# Altium PCB IPMC_MACP - ADC放错位置.PcbDoc
Units mil, origin at the board's own origin, x right, y up, seen from the top; angles counter-clockwise.
Board outline 3909.92 x 3909.91 mil, 2 copper layers (Top Layer, Bottom Layer); 133 components, 84 nets, 498 pads, 171 vias.
Unrouted connection lines stored in the file: 86.
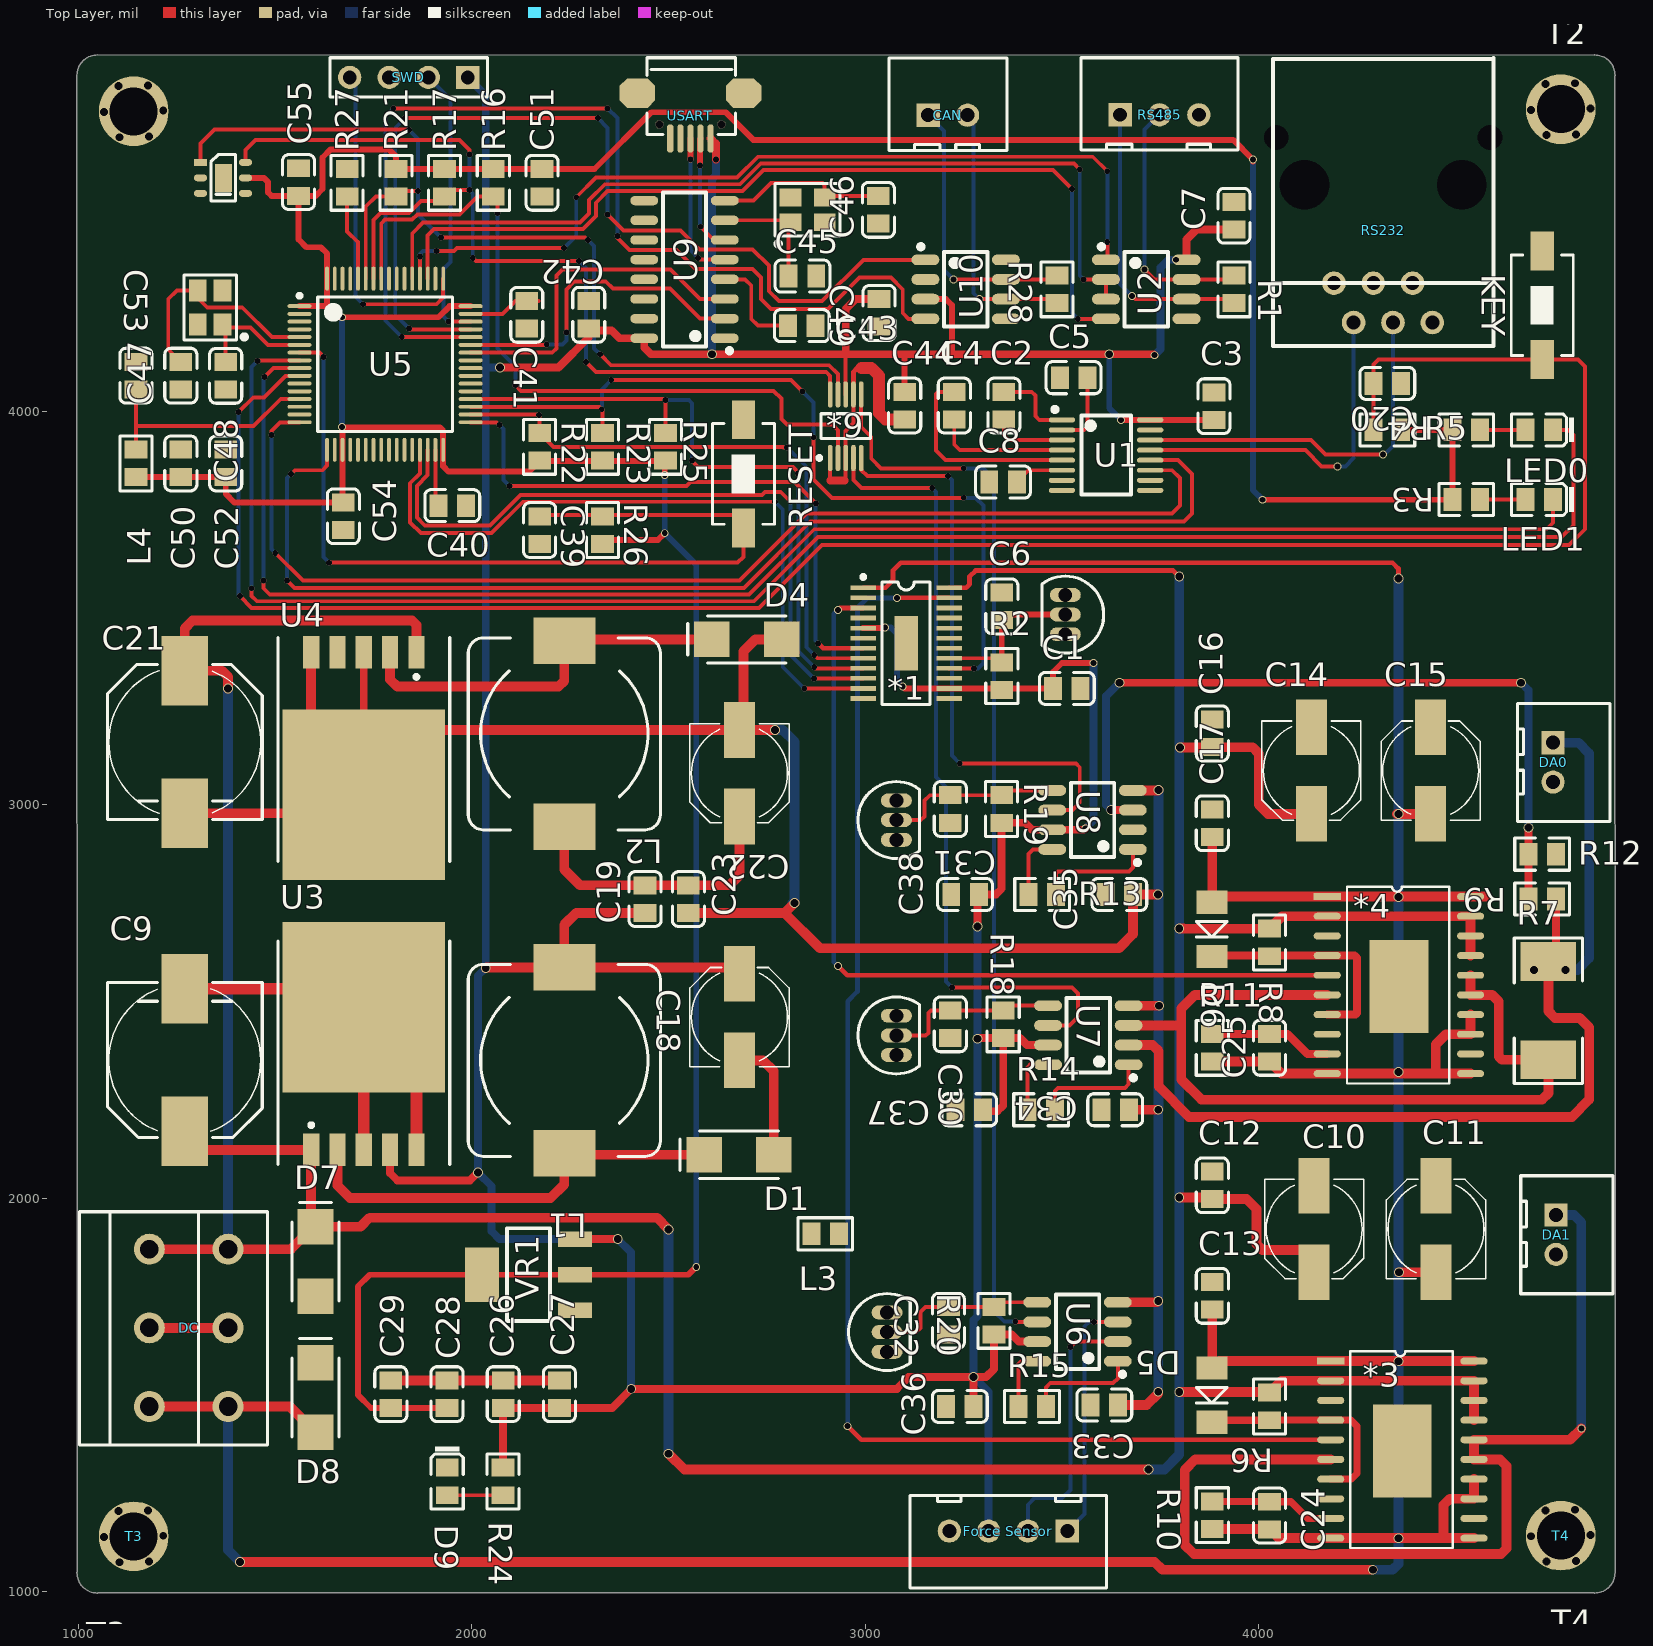
[diagram p0: Top Layer view]
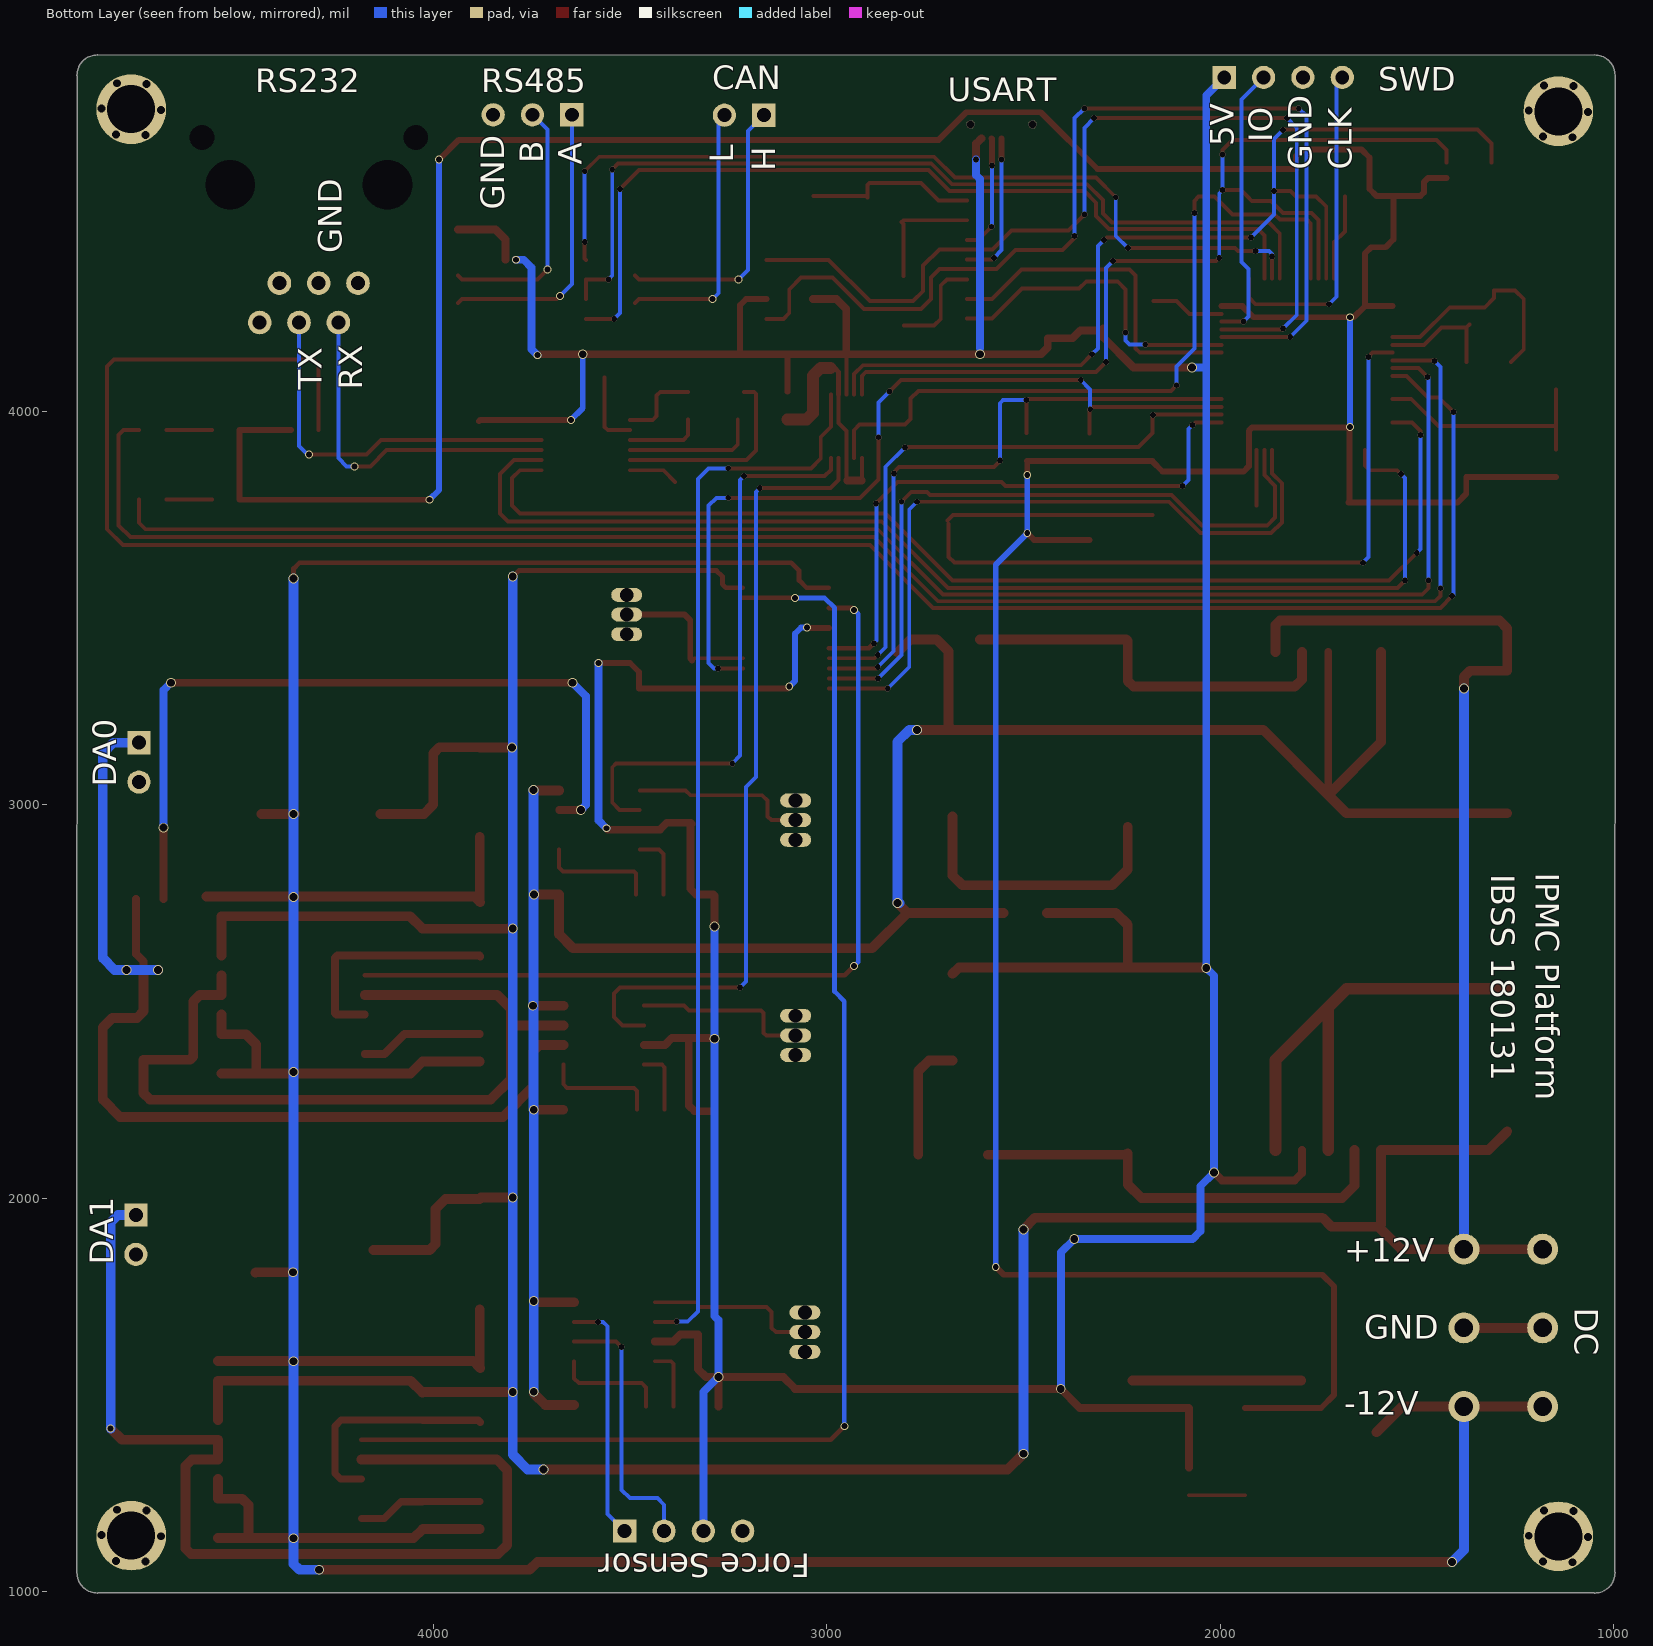
[diagram p1: Bottom Layer view, seen from below]
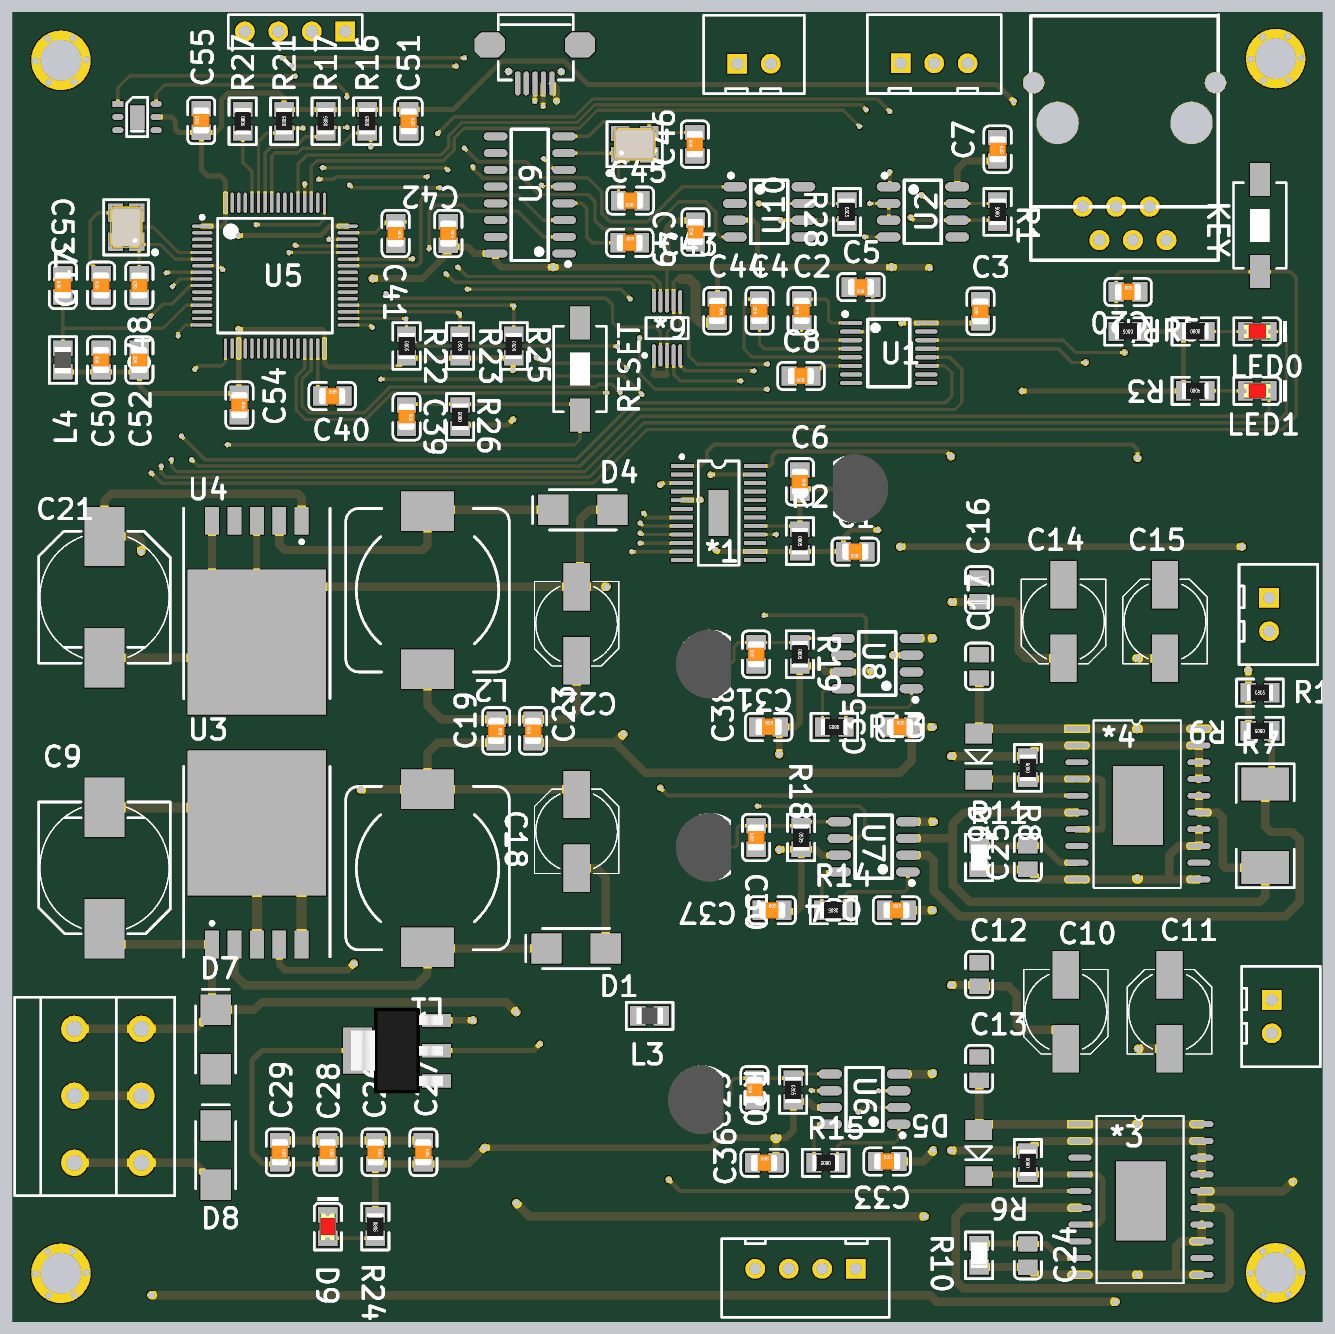
[diagram p2: 3D render of the assembled board from above, using the file's embedded part models]

## Layer stack, top to bottom
Top Solder: solder mask 0.4, Solder Resist, Dk 3.5
Top Layer: signal copper 1.4
Dielectric 1: dielectric 12.6, FR-4, Dk 4.8
Bottom Layer: signal copper 1.4
Bottom Solder: solder mask 0.4, Solder Resist, Dk 3.5

## Board outline
1040.51,996.32 ccw(c1042.13,1000) 1042.13,995.99 1043.65,995.99 ccw(c1047.64,1047.64) 1047.64,995.83 ccw(c1047.64,999.84) 1048.74,995.99 4852.84,995.98 ccw(c4853.94,999.84) 4853.94,995.83 ccw(c4853.94,1047.64) 4905.74,1047.45 ccw(c4901.73,1047.64) 4905.75,1047.64 ccw(c4901.73,1047.64) 4905.75,1047.64 4905.59,4852.84 ccw(c4901.73,4853.94) 4905.74,4853.94 ccw(c4853.94,4853.94) 4853.94,4905.74 ccw(c4853.94,4901.73) 4852.82,4905.59 1047.64,4905.74 ccw(c1047.64,4901.73) 1047.64,4905.74 ccw(c1047.64,4853.94) 995.83,4854.12 ccw(c999.84,4853.94) 995.83,4853.94 995.98,1048.74 ccw(c999.84,1047.64) 995.83,1047.64 ccw(c1047.64,1047.64)

## Design rules (kind name [scope] priority, off if disabled: settings)
Clearance [All] p1: gap=7 ignorepadtopadclearanceinfootprint=FALSE except(0: Arc-Hole Track-Hole SMDPad-Hole THPad-Hole Via-Hole Fill-Hole Poly-Hole Region-Hole Text-Hole)
PolygonConnect [All] p1: connectstyle=Relief reliefconductorwidth=10 reliefentries=4 polygonreliefangle="90 Angle" airgapwidth=10
RoutingVias [All] p1: holewidth=28 width=50 viastyle="Through Hole" minholewidth=15 minwidth=15 maxholewidth=28 maxwidth=50
SolderMaskExpansion [All] p1: expansion=4
Width [All] p1: maxlimit=50 minlimit=8 preferedwidth=10
30 further rules are at their usual default settings.

## Classes and differential pairs
component class IPMC_MACP: *1 *3 *4 *9 C1 C2 C3 C4 C5 C6 C7 C8 C9 C10 C11 C12 C13 C14 C15 C16 C17 C18 C19 C20 C21 C22 C23 C24 C25 C26 C27 C28 C29 C30 C31 C32 C33 C34 C35 C36 C37 C38 C39 C40 C41 C42 C43 C44 C45 C46 C47 C48 C49 C50 C51 C52 C53 C54 C55 CAN D1 D4 D5 D6 D7 D8 D9 "Force Sensor" L2 L3 L4 R1 R2 R3 R4 R5 R6 R7 R8 R9 R10 R11 R12 R13 R14 R15 R16 R17 R18 R19 R20 R21 R22 R23 R24 R25 R26 R27 R28 RESET RS232 RS485 SWD T2 T3 T4 U1 U2 U3 U4 U5 U6 U7 U8 U9 U10 USART VR1

## Components (designator, comment, footprint, x,y, rotation, side; value= is the part's Value field where it differs from the comment)
*1 "AD5722" TSSOP24P 3103.75,3410.43 r270 top
*2 "LM336" TO-92A 3508.19,3483.07 r180 top
*3 "OPA564AIDWP" HSOP20 4182.91,1585.43 r0 top
*4 "OPA564AIDWP" HSOP20 4174.14,2766.32 r0 top
*6 "LM336" TO-92A 3078.74,2413.39 r0 top
*7 "LM336" TO-92A 3078.74,2960.63 r0 top
*8 "LM336" TO-92A 3055.12,1659.13 r0 top
*9 "ADS1115" MSOP-UN10_N 2950,3962.08 r90 top
*10 "SHT20" DFN6 1423,4554.68 r180 top
C1 "100nF" 0805_C 3512.13,3295.28 r180 top
C2 "100nF" 0805_C 3352.07,4014.44 r90 top
C3 "100nF" 0805_C 3886,4013 r90 top
C4 "100nF" 0805_C 3226.04,4014.44 r90 top
C5 "100nF" 0805_C 3529.24,4085.31 r180 top
C6 "100nF" 0805_C 3346.77,3503.94 r270 top
C7 "100nF" 0805_C 3937,4497 r270 top
C8 "100nF" 0805_C 3350,3820 r180 top
C9 "470uF/35V" C-RB-S10 1270,2350.67 r90 top
C10 "47uF/35V" C-RB-S6 4140.81,1921.18 r90 top
C11 "47uF/35V" C-RB-S6 4450.58,1921.18 r270 top
C12 "100nF" 0805_C 3881.89,2032.42 r270 top
C13 "100nF" 0805_C 3881.89,1751.28 r270 top
C14 "47uF/35V" C-RB-S6 4133.86,3086.61 r90 top
C15 "47uF/35V" C-RB-S6 4437.01,3086.61 r270 top
C16 "100nF" 0805_C 3881.89,3181.1 r270 top
C17 "100nF" 0805_C 3881.89,2952.76 r270 top
C18 "220uF/16V" C-RB-S6 2680,2460 r270 top
C19 "100nF" 0805_C 2440,2760 r270 top
C20 "100nF" 0805_C 4326.77,4070.87 r0 top
C21 "470uF/35V" C-RB-S10 1270,3159.33 r270 top
C22 "220uF/16V" C-RB-S6 2680,3080 r90 top
C23 "100nF" 0805_C 2550,2760 r90 top
C24 "1nF" 0805_C 4027.56,1192.91 r90 top
C25 "1nF" 0805_C 4027.56,2381.89 r90 top
C26 "10uF" 0805_C 2079.47,1501.51 r270 top
C27 "100nF" 0805_C 2222.39,1501.51 r270 top
C28 "10uF" 0805_C 1936.56,1501.51 r270 top
C29 "100nF" 0805_C 1793.64,1501.51 r270 top
C30 "100nF" 0805_C 3215.91,2441.64 r90 top
C31 "100nF" 0805_C 3215.91,2988.88 r90 top
C32 "100nF" 0805_C 3211.22,1687.87 r90 top
C33 "100nF" 0805_C 3607.54,1474.09 r0 top
C34 "100nF" 0805_C 3635.1,2224.41 r0 top
C35 "100nF" 0805_C 3645.67,2771.65 r0 top
C36 "100nF" 0805_C 3240.16,1470.16 r0 top
C37 "100nF" 0805_C 3263.78,2224.41 r0 top
C38 "100nF" 0805_C 3253.35,2771.65 r0 top
C39 "100nF" 0805_C 2172.05,3698 r270 top
C40 "2.2uF" 0805_C 1950,3760 r0 top
C41 "2.2uF" 0805_C 2139.29,4245.17 r270 top
C42 "100nF" 0805_C 2296.83,4245.17 r270 top
C43 "100nF" 0805_C 2838.64,4217.61 r0 top
C44 "100nF" 0805_C 3100,4014.44 r270 top
C45 "22pF" 0805_C 2840.09,4343.59 r180 top
C46 "22pF" 0805_C 3033,4512 r90 top
C47 "22pF" 0805_C 1259.84,4090.55 r90 top
C48 "22pF" 0805_C 1374.02,4090 r90 top
C49 "100nF" 0805_C 3035,4250 r90 top
C50 "100nF" 0805_C 1259.84,3867.4 r90 top
C51 "100nF" 0805_C 2178.13,4580.63 r270 top
C52 "100nF" 0805_C 1374.02,3867.4 r90 top
C53 "100nF" 0805_C 1145.67,4090.55 r90 top
C54 "100nF" 0805_C 1673,3733 r270 top
C55 "100nF" 0805_C 1559.06,4582.68 r90 top
CAN "Header 2" HDR2X1_B1 3159.79,4752.64 r0 top (schematic designator CAN1)
D1 "1N5824" DIODE-SMA 2767.16,2110 r180 top
D4 "1N5824" DIODE-SMA 2787.16,3420 r180 top
D5 "1N4732" DIODE-1206 3880.57,1567.83 r270 top
D6 "1N4732" DIODE-1206 3880.57,2751.97 r270 top
D7 "1N4001" DIODE-SMA 1602.2,1749.88 r90 top
D8 "1N4001" DIODE-SMA 1602.2,1404.53 r90 top
D9 "红灯 0805" 0805_LED_S1 1937.01,1279.53 r270 top
DA0 "Header 2" HDR2X1_B1 4748.03,3157.48 r270 top (schematic designator DA1)
DA1 "Header 2" HDR2X1_B1 4755.91,1956.69 r270 top (schematic designator DA2)
DC "KF301-3P" KF301-3P 1180,1470 r90 top (schematic designator *5)
"Force Sensor" "Header 4" HDR4X1_B1 3513.39,1153.54 r180 top (schematic designator "Force Sensor1")
KEY "SW-PB" SW_PB2_A1 4720.47,4271.65 r180 top (schematic designator S1)
L1 "33uH" L-SMD-12 2234.69,2350 r90 top
L2 "33uH" L-SMD-12 2234.69,3180 r270 top
L3 "10uH/磁珠" 0805_L 2897.96,1909 r0 top
L4 "10uH" 0805_L 1145.67,3867.4 r270 top
LED0 "红灯 0805" 0805_LED_S1 4712.6,3952.76 r180 top (schematic designator D3)
LED1 "翠绿 0805" 0805_LED_S1 4712.6,3775.59 r180 top (schematic designator D2)
R1 "120Ω" 0805_R 3937,4310 r90 top
R2 "2.4KΩ" 0805_R 3346.77,3326.77 r270 top
R3 "1KΩ" 0805_R 4527.56,3775.59 r0 top
R4 "1KΩ" 0805_R 4527.56,3952.76 r0 top
R5 "10KΩ" 0805_R 4326.77,3952.76 r180 top
R6 "10KΩ" 0805_R 4027.56,1470.13 r90 top
R7 "10mR" 2512 4736.22,2476.38 r90 top
R8 "10KΩ" 0805_R 4027.56,2649.61 r90 top
R9 "10KΩ" 0805_R 4720.47,2759.84 r180 top
R10 "10KΩ" 0805_R 3881.89,1193.9 r90 top
R11 "10KΩ" 0805_R 3881.89,2381.89 r90 top
R12 "1KΩ" 0805_R 4720.47,2874.02 r0 top
R13 "0Ω" 0805_R 3449.51,2771.65 r180 top
R14 "200Ω" 0805_R 3446.85,2224.41 r180 top
R15 "1KΩ" 0805_R 3423.85,1470.16 r180 top
R16 "4.7KΩ" 0805_R 2054.28,4580.63 r90 top
R17 "4.7KΩ" 0805_R 1930.44,4580.63 r90 top
R18 "2.4KΩ" 0805_R 3350.39,2441.64 r270 top
R19 "2.4KΩ" 0805_R 3346.46,2988.89 r270 top
R20 "2.4KΩ" 0805_R 3326.77,1687.87 r270 top
R21 "4.7KΩ" 0805_R 1806.6,4580.63 r90 top
R22 "4.7KΩ" 0805_R 2172.05,3909.45 r270 top
R23 "4.7KΩ" 0805_R 2332.09,3909.45 r270 top
R24 "1KΩ" 0805_R 2078.74,1279.53 r270 top
R25 "4.7KΩ" 0805_R 2492.13,3909.45 r270 top
R26 "10KΩ" 0805_R 2332.09,3698 r90 top
R27 "10KΩ" 0805_R 1682.76,4580.63 r270 top
R28 "120Ω" 0805_R 3487,4310 r270 top
RESET "SW-PB" SW_PB2_A1 2690,3843 r180 top (schematic designator RESET1)
RS232 "RJ11" RJ6-RJ11 4316.23,4325.57 r270 top (schematic designator RS1)
RS485 "Header 3" HDR3X1_B1 3647.75,4753.64 r0 top (schematic designator RS2)
SWD "Header 4" HDR1X4 1989.25,4848.64 r180 top (schematic designator SWD1)
T1 "M3铜柱螺丝孔" 螺丝孔-3MM 1140,4762.52 r0 top
T2 "M3铜柱螺丝孔" 螺丝孔-3MM 4767.72,4767.72 r0 top
T3 "M3铜柱螺丝孔" 螺丝孔-3MM 1140,1140 r0 top
T4 "M3铜柱螺丝孔" 螺丝孔-3MM 4767.72,1141.73 r0 top
U1 "SP3232EEY-L/TR" TSSOP-16 3611.91,3888.46 r270 top
U2 "SP3485EN-L/TR" SOIC-8_150MIL 3714,4310 r270 top
U3 "LM2596S-5.0" TO-263-5 1725,2288.66 r0 top
U4 "LM2596S-5.0" TO-263-5 1725,3221.34 r180 top
U5 "STM32F405RGT6" STM-LQFP64_L 1779.21,4119.57 r0 top
U6 "AD620ARZ-REEL" SOIC-8_150MIL 3539.37,1660.12 r90 top
U7 "AD620ARZ-REEL" SOIC-8_150MIL 3566.93,2413.88 r90 top
U8 "AD620ARZ-REEL" SOIC-8_150MIL 3577.5,2961.13 r90 top
U9 "CH340G" SOIC-16_150MIL 2540.31,4360.44 r90 top
U10 "CAN/TJA1050T/CM" SOIC-8_150MIL 3255,4310 r270 top
USART "USB_M" USB_MICRO 2655.39,4758.64 r180 top (schematic designator USB_USART1)
VR1 "AMS1117-3.3" ? 2143.78,1805 r0 top
Y1 "12MHZ" SMD-3225_4P 2853.14,4512.07 r0 top
Y2 "25MHZ" SMD-3225_4P 1334.65,4263.78 r90 top

## Footprints (in the part's own frame and the unit in brackets; to place one, negate y for a bottom-side part, rotate by r counter-clockwise, add the part's x,y. Pads: shape width x height; smd on the part's side, far side on the other; paste and mask are expansions set on the pad)
0805_C [mm]
  rect 1.16x1.47 smd: 1(-0.89,0) 2(0.89,0)
  silkscreen extent -1.77,-1.04 1.77,1.04, body extent -1,-0.62 1,0.63, height 0.77
0805_L [mm]
  rect 1.16x1.47 smd: 1(-0.89,0) 2(0.89,0)
  silkscreen extent -1.77,-1.04 1.77,1.03, body extent -1.02,-0.64 1.03,0.64, height 0.6
0805_LED_S1 [mm]
  rect 1.16x1.47 smd: A(0.89,0) K(-0.89,0)
  silkscreen extent -2.25,-1.04 1.77,1.03, body extent -1.01,-0.62 1.01,0.62, height 1.1
0805_R [mm]
  rect 1.16x1.47 smd: 1(-0.89,0) 2(0.89,0)
  silkscreen extent -1.77,-1.04 1.77,1.03, body extent -1,-0.62 1,0.63, height 0.49
2512 [mm]
  rect 2.5x3.6 smd: 1(-3.175,0) 2(3.175,0)
  silkscreen extent -4.7,-2.2 4.7,2.2, body extent -3.17,-1.65 3.17,1.65, height 1.2
C-RB-S6 [mm] "贴片电解"
  rect 3.6x2 smd: 1(-2.794,0) 2(2.794,0)
  silkscreen extent -3.2,-3.2 3.2,3.2, body extent -3.15,-3.12 3.15,3.17, height 7.7
C-RB-S10 [mm] "贴片电解"
  rect 4.5x3 smd: 1(-4.6,0) 2(4.6,0)
  silkscreen extent -5,-5 5,5, body extent -4.97,-4.92 5.03,5.08, height 10
DFN6 [mm]
  rect 0.85x0.45 smd: 1(2.87,-1.981)
  rect 1.1x1.8 smd: 2(1.397,-0.965)
  oval 0.85x0.45 smd: 2(2.87,-0.981) 3(2.87,0.019) 4(-0.03,0.019) 5(-0.03,-0.981) 6(-0.03,-1.981)
  silkscreen extent 0.61,-2.48 2.2,0.52, body extent 0.19,-2.46 2.63,0.55, height 1
DIODE-1206 [mm] "玻璃封装二极管"
  rect 1.5x2 smd: 1(0,0) 2(3.5,0)
  silkscreen extent 1.25,-1 2.25,1
DIODE-SMA [mm] "贴片二极管"
  rect 2.3x2.3 smd: 1(0,0) 2(4.5,0)
  silkscreen extent -0.29,-1.52 6.06,1.52, body extent -0.67,-1.4 5.17,1.4, height 3
HDR1X4 [mm] "Connector; Header; 4 Position"
  rect 1.5x1.5 hole 0.9: 1(0,0)
  round 1.5 hole 0.9: 2(2.54,0) 3(5.08,0) 4(7.62,0)
  silkscreen extent -1.27,-1.27 8.89,1.27
HDR2X1_B1 [mm] "Connector; Header; 4 Position"
  rect 1.5x1.5 hole 0.9: 1(0,0)
  round 1.5 hole 0.9: 2(2.54,0)
  silkscreen extent -2.54,-2.29 5.08,3.68, body extent -2.41,-2.16 5.08,3.56, height 1.5
HDR3X1_B1 [mm] "Connector; Header; 3 Position"
  rect 1.5x1.5 hole 0.9: 1(0,0)
  round 1.5 hole 0.9: 2(2.54,0) 3(5.08,0)
  silkscreen extent -2.54,-2.29 7.62,3.68, body extent -2.54,-2.29 7.62,3.68, height 1.5
HDR4X1_B1 [mm] "Connector; Header; 4 Position"
  rect 1.5x1.5 hole 0.9: 1(0,0)
  round 1.5 hole 0.9: 2(2.54,0) 3(5.08,0) 4(7.62,0)
  silkscreen extent -2.54,-2.29 10.16,3.68, body extent -2.41,-2.16 10.03,3.56, height 1.5
HSOP20 [mm]
  rect 1.75x0.45 smd: 1(0,0)
  oval 1.75x0.45 smd: 2(0,-1.27) 3(0,-2.54) 4(0,-3.81) 5(0,-5.08) 6(0,-6.35) 7(0,-7.62) 8(0,-8.89) 9(0,-10.16) 10(0,-11.43) 11(9.254,-11.43) 12(9.254,-10.16) 13(9.254,-8.89) 14(9.254,-7.62) 15(9.254,-6.35) 16(9.254,-5.08) 17(9.254,-3.81) 18(9.254,-2.54) 19(9.254,-1.27) 20(9.254,0)
  rect 3.8x6 smd: ""(4.623,-5.817)
  silkscreen extent 1.27,-12.06 7.87,0.64, body extent 1.27,-12.06 7.87,0.64, height 0.25
KF301-3P [mm] "蓝色端子"
  round 2 hole 1.2: 1(0,0) 1(0,-5.08) 2(5.08,-5.08) 2(5.08,0) 3(10.16,-5.08) 3(10.16,0)
  silkscreen extent -2.49,-7.62 12.57,4.52
L-SMD-12 [mm] "贴片电感12*12"
  rect 3x4 smd: 1(-6,0) 2(6,0)
  silkscreen extent -6.2,-6.2 6.2,6.2, body extent -6.2,-6.22 6.2,6.17, height 2.5
MSOP-UN10_N [mm] "TSSOP"
  oval 1.7x0.3 smd: 1(-2.05,1) 2(-2.05,0.5) 3(-2.05,0) 4(-2.05,-0.5) 5(-2.05,-1) 6(2.05,-1) 7(2.05,-0.5) 8(2.05,0) 9(2.05,0.5) 10(2.05,1)
  silkscreen extent -2.17,-1.6 0.8,1.82, body extent -1.6,-1.6 1.6,1.6, height 1.1
RJ6-RJ11 [mil]
  round 60 hole 35.43: 1(100,125) 2(0,75) 3(100,25) 4(0,-25) 5(100,-75) 6(0,-125)
  round 60 hole 125.98: 7(-250,200) 8(-250,-200)
  round 60 hole 62.99: 9(-370,271.65) 10(-370,-271.65)
  silkscreen extent -572,-280 160,280, body extent -570,-280 160,280, height 512
SMD-3225_4P [mm]
  rect 1.4x1.15 smd: 1(-1.1,-0.8) 2(1.1,-0.8) 3(1.1,0.8) 4(-1.1,0.8)
  silkscreen extent -2.1,-2.35 2.1,1.7, body extent -1.6,-1.25 1.6,1.25, height 0.61
SOIC-8_150MIL [mm]
  oval 0.7x1.8 smd: 1(-1.905,-2.6) 2(-0.635,-2.6) 3(0.635,-2.6) 4(1.905,-2.6) 5(1.905,2.6) 6(0.635,2.6) 7(-0.635,2.6) 8(-1.905,2.6)
  silkscreen extent -2.9,-3.05 2.4,1.4
SOIC-16_150MIL [mm]
  oval 0.6x1.8 smd: 1(-4.445,-2.6) 2(-3.175,-2.6) 3(-1.905,-2.6) 4(-0.635,-2.6) 5(0.635,-2.6) 6(1.905,-2.6) 7(3.175,-2.6) 8(4.445,-2.6) 9(4.445,2.6) 10(3.175,2.6) 11(1.905,2.6) 12(0.635,2.6) 13(-0.635,2.6) 14(-1.905,2.6) 15(-3.175,2.6) 16(-4.445,2.6)
  silkscreen extent -5.4,-3.05 4.97,1.4
STM-LQFP64_L [mm] "Thin QFP, 64-Leads, Body 10x10mm, Pitch 0.5mm, IPC High Density"
  oval 1.55x0.25 smd: 1(-5.525,3.75) 2(-5.525,3.25) 3(-5.525,2.75) 4(-5.525,2.25) 5(-5.525,1.75) 6(-5.525,1.25) 7(-5.525,0.75) 8(-5.525,0.25) 9(-5.525,-0.25) 10(-5.525,-0.75) 11(-5.525,-1.25) 12(-5.525,-1.75) 13(-5.525,-2.25) 14(-5.525,-2.75) 15(-5.525,-3.25) 16(-5.525,-3.75) 33(5.525,-3.75) 34(5.525,-3.25) 35(5.525,-2.75) 36(5.525,-2.25) 37(5.525,-1.75) 38(5.525,-1.25) 39(5.525,-0.75) 40(5.525,-0.25) 41(5.525,0.25) 42(5.525,0.75) 43(5.525,1.25) 44(5.525,1.75) 45(5.525,2.25) 46(5.525,2.75) 47(5.525,3.25) 48(5.525,3.75)
  oval 0.25x1.55 smd: 17(-3.75,-5.525) 18(-3.25,-5.525) 19(-2.75,-5.525) 20(-2.25,-5.525) 21(-1.75,-5.525) 22(-1.25,-5.525) 23(-0.75,-5.525) 24(-0.25,-5.525) 25(0.25,-5.525) 26(0.75,-5.525) 27(1.25,-5.525) 28(1.75,-5.525) 29(2.25,-5.525) 30(2.75,-5.525) 31(3.25,-5.525) 32(3.75,-5.525) 49(3.75,5.525) 50(3.25,5.525) 51(2.75,5.525) 52(2.25,5.525) 53(1.75,5.525) 54(1.25,5.525) 55(0.75,5.525) 56(0.25,5.525) 57(-0.25,5.525) 58(-0.75,5.525) 59(-1.25,5.525) 60(-1.75,5.525) 61(-2.25,5.525) 62(-2.75,5.525) 63(-3.25,5.525) 64(-3.75,5.525)
  silkscreen extent -5.65,-4.35 4.35,4.55, body extent -5,-5 5,5, height 1.6
SW_PB2_A1 [mm]
  rect 1.5x2.5 smd: 1(0,3.556) 2(0,-3.444)
  silkscreen extent -2,-3.19 2,3.31, body extent -2.03,-3.18 2.03,3.3, height 1.2
TO-92A [mm]
  oval 2x0.9 hole 0.9: 1(0,-1.27) 2(0,0) 3(0,1.27)
  silkscreen extent -2.48,-2.48 1.5,2.48, body extent -2.6,-2.64 1.6,2.59, height 8
TO-263-5 [mm] "贴片LM2596"
  rect 1.05x2.1 smd: 1(-3.4,-4.225) 2(-1.7,-4.225) 3(0,-4.225) 4(1.7,-4.225) 5(3.4,-4.225)
  rect 10.5x11 smd: 6(0,4.987)
  silkscreen extent -5.55,-5.18 5.55,9.28, body extent -5.33,-4.7 5.33,10.29, height 3
TSSOP24P [mm] "Shrink Small Outline; 24 Leads; Body Width 4.4 mm; Pitch 0.65 mm"
  rect 0.3x1.65 smd: 1(-3.575,-2.775) 2(-2.925,-2.775) 3(-2.275,-2.775) 4(-1.625,-2.775) 5(-0.975,-2.775) 6(-0.325,-2.775) 7(0.325,-2.775) 8(0.975,-2.775) 9(1.625,-2.775) 10(2.275,-2.775) 11(2.925,-2.775) 12(3.575,-2.775) 13(3.575,2.775) 14(2.925,2.775) 15(2.275,2.775) 16(1.625,2.775) 17(0.975,2.775) 18(0.325,2.775) 19(-0.325,2.775) 20(-0.975,2.775) 21(-1.625,2.775) 22(-2.275,2.775) 23(-2.925,2.775) 24(-3.575,2.775)
  rect 3.5x1.5 smd: 25(0,0)
  silkscreen extent -4.4,-2.9 3.95,1.55
TSSOP-16 [mm]
  oval 0.32x1.7 smd: 1(-2.275,-2.85) 2(-1.625,-2.85) 3(-0.975,-2.85) 4(-0.325,-2.85) 5(0.325,-2.85) 6(0.975,-2.85) 7(1.625,-2.85) 8(2.275,-2.85) 9(2.275,2.85) 10(1.625,2.85) 11(0.975,2.85) 12(0.325,2.85) 13(-0.325,2.85) 14(-0.975,2.85) 15(-1.625,2.85) 16(-2.275,2.85)
  silkscreen extent -3.1,-3.45 2.55,1.6
USB_MICRO [mm] "USB方孔"
  oct 0.4x1.8 smd: 1(1.24,1.651) 2(1.89,1.651) 3(2.54,1.651) 4(3.19,1.651) 5(3.84,1.651)
  oct 2.286x1.9 smd: 6(5.969,-1.27) 7(-0.889,-1.27)
  round 0.54 hole 0.54: ""(0.54,0.753) ""(4.54,0.753)
  silkscreen extent -0.38,-3.56 5.33,1.4, body extent -0.43,-3.61 5.38,1.47, height 1.85
螺丝孔-3MM [mm]
  round 4.5 hole 3.1: 1(0,0)
? [mm]
  rect 2.2x1 smd: 1(3,-2.3) 2(3,0) 3(3,2.3)
  rect 2.2x3.5 smd: 2(-3,0)
  silkscreen extent -1.4,-3 1.4,3, body extent -3.49,-3.24 3.49,3.24, height 1.64

## Part data
*1: "双极性DAC"
*2 *6 *7 *8: "基准电压芯片2.5/5V"
*3 *4: "PAD on Bottom"
C1 C2 C3 C4 C5 C6 C7 C8 C12 C13 C16 C17 C19 C20 C23 C27 C29 C30 C31 C32 C33 C34 C35 C36 C37 C38 C39 C42 C43 C44 C49 C50 C51 C52 C53 C54 C55: library part "0805 100nF(104) 10% 50V", "贴片电容"
C9 C10 C11 C14 C15 C18 C21 C22: library part "Cap Pol", "极性电解电容"
C24 C25: library part "0805 1nF (102) 10% 50V", "贴片电容"
C26 C28: library part "0805 10uF (106) 10% 25V", "贴片电容"
C40 C41: library part "0805 2.2uF (225) 20% 50V", "贴片电容"
C45 C46 C47 C48: library part "0805 22pF (220) 5% 50V", "贴片电容"
CAN DA0 DA1 RS485: "接插件"
D1 D4 D7 D8: library part Diode, "二极管"
D5 D6: library part Diode-Z, "稳压二极管"
D9 LED0: library part "0805 红灯", "发光二极管"
DC: "蓝色端子"
"Force Sensor" SWD: "Header, 4-Pin"
KEY RESET: "微动开关"
L1 L2: library part Inductor, "电感"
L3 L4: library part "0805 10uH 10%", "贴片电感"
LED1: library part "0805 翠绿", "发光二极管"
R1 R28: library part "0805 120Ω (1200) 1%", "贴片电阻"
R2 R18 R19 R20: library part "0805 2.4KΩ (2401) 1%", "贴片电阻"
R3 R4 R15 R24: library part "0805 1KΩ (1001) 1%", "贴片电阻"
R5 R6 R8 R10 R11 R26 R27: library part "0805 10KΩ (1002) 1%", "贴片电阻"
R7: library part Res1, "贴片电阻"
R9 R12: library part "0805 20KΩ (2002) 1%", "贴片电阻"
R13: library part "0805 0Ω (0R0) 1%", "贴片电阻"
R14: library part "0805 200Ω (2000) 1%", "贴片电阻"
R16 R17 R21 R22 R23 R25: library part "0805 4.7KΩ (4701) 1%", "贴片电阻"
U1: "RS232"
U2: "RS-485/RS-422"
U3 U4: "5V稳压芯片"
U5: "ARM Cortex-M4 32-bit MCU+FPU, 210 DMIPS, 1024 kB Flash, 192 kB Internal RAM, 51 I/Os, 64-pin LQFP, -40 to 85 degC, Tray"
U6 U7 U8: "仪放"
U9: "USB"
U10: "CAN"
USART: "MicroUSB接口"
VR1: library part "SOT-223 AMS1117-3.3", "低压差线性稳压(LDO)"
Y1: library part "SMD-3225_4P  12MHZ 20PF 10PPM", "贴片晶振"
Y2: library part "SMD-3225_4P  25MHZ 12PF 10PPM", "贴片晶振"

## Via types
v1: diameter 15, hole 15, Top Layer to Bottom Layer, 80 vias
v2: diameter 25, hole 20, Top Layer to Bottom Layer, 42 vias
v3: diameter 20, hole 15, Top Layer to Bottom Layer, 25 vias
v4: diameter 20, hole 20, Top Layer to Bottom Layer, 24 vias

## Nets (pads, with @x,y where several pads share a name; then routed paths per layer and width w, separated by ;. In a path a pad name is that pad's centre, name@x,y a point inside that pad or via, vN(x,y) a via of type N, cw(c..) or ccw(c..) an arc to the next point about the centre after c; other vN are vias at no path point)
2.5V: *1.17 *2.2 C6.2 R2.1 | length 402.4
  Top Layer w10: *1.17 3336.54,3372.05 R2.1@3341.79,3366.79
  Top Layer w15: R2.1@3341.79,3366.79 3346.77,3371.77 C6.2 3360.95,3483.07 *2.2
3.3V: *10.5 C28.2 C29.2 C50.1 C51.1 C52.1 C54.1 C55.1 L4.2 R3.1 R4.1 R5.1 R16.2 R17.2 R21.2 R22.2 R23.2 R25.2 R26.1 U5.1 U5.19 U5.32 U5.48 U5.64 VR1.2 | length 10910.6
  Top Layer w15: L4.2 C50.1 C52.1 1374.02,3790 1395.98,3768.04 C54.1@1670.94,3768.04 ; *10.5 1470.69,4593.31 1482,4582 1482,4556 1490.36,4547.64 C55.1 ; U5.1 1631.57,4267.2 ; C54.1 C54.1@1670.94,3768.04 ; C28.2 C29.2 1743.53,1466.47 1710,1500 1710,1775 1740,1805 2025.67,1805 2261.89,1805 2550,1805 v3(2570,1825) ; U5.48 1943.2,4267.2 1915,4239 v3(1670,4239) 1659.78,4239 1631.57,4267.2 ; R26.1@2332.09,3672.96 2472.96,3672.96 v3(2490,3690) ; v3(2490,3838) 2490,3872.28 2490.75,3873.03 2172.05,3873.03 2146.01,3847 1940,3847 1926.85,3860.15 U5.32 1926.85,3950.15 1918,3959 1677,3959 1670.94,3952.94 U5.19 C54.1@1670.94,3768.04 ; v3@3985,4635 v3(3985,4640) 3935,4690 2715,4690 2645,4760 2455.96,4760 2311.63,4615.67 C51.1 R16.2 R17.2 R21.2 1806.6,4648.4 1790,4665 1640,4665 1620,4645 1620,4565 1602.64,4547.64 C55.1 ; v3(4010,3775) 4491.93,3775 R3.1 R4.1 R5.1 ; C55.1 1559.06,4436.94 1579,4417 1616,4417 1631.57,4401.43 U5.64 1631.57,4267.2
  Bottom Layer w15: v3(1670,3960) v3(1670,4239) ; v3@2490,3830 v3(2490,3690) 2570,3610 v3(2570,1825) ; v3(3985,4640) 3985,3800 v3(4010,3775)
485-A: R1.1 RS485.1 U2.6 | length 739.6
  Top Layer w10: v3(3678,4293) 3686,4285 U2.6 3926.96,4285 R1.1
  Bottom Layer w10: RS485.1 3647.75,4323.25 v3(3678,4293)
485-B: R1.2 RS485.2 U2.7 | length 650.8
  Top Layer w10: v3(3710,4360) 3735,4335 U2.7 3926.96,4335 R1.2
  Bottom Layer w10: v3(3710,4360) 3710,4715.88 RS485.2
+5V: "Force Sensor.3" *1.5 *1.14 *9.8 C1.2 C3.1 C7.2 C18.1 C19.2 C26.2 C27.2 C36.2 C37.2 C38.2 C42.2 C44.1 C49.2 L1.2 R2.2 R18.2 R19.2 R20.2 R24.1 SWD.1 U1.16 U2.8 U3.4 U6.7 U7.7 U8.7 U9.16 U10.3 USART.1 VR1.3 | length 14341.7
  Top Layer w10: *9.8 2950,4145
  Top Layer w15: *1.5 3048.82,3448.82 v3(3050,3450) ; v3(3095,3300) 3099.72,3295.28 *1.14 C1.2 3477.09,3337.09 3500,3360 v3(3580,3360) ; C44.1 3100,4145 ; U10.3 3205,4285 3220,4270 3220,4145 ; v3(3650,3978.02) U1.16 3880.22,3978.02 C3.1@3883.57,3974.68
  Top Layer w20: U3.4 1791.93,2063.07 1810,2045 1995,2045 v2(2015,2065) ; v2(2071,4111) 2220,4111 2296.83,4187.83 C42.2 2301.51,4205.44 2355,4205.44 2375,4185.44 U9.16 2437.95,4162.05 2455,4145 v2(2610,4145) 2950,4145 ; R24.1 2078.74,1465.74 C26.2 C27.2 2356.47,1466.47 v2(2405,1515) 3080,1515 3110,1545 v2(3275.2,1545) ; VR1.3 v2(2370.55,1895.55) ; USART.1 2620,4680.21 v1(2620,4640) ; C49.2 2975.04,4285.04 2950,4260 2950,4145 ; C36.2 v2(3275.2,1545) ; v2(3285,2405) 3286.6,2406.6 R18.2 ; v2(3285,2690) 3285,2768.27 C38.2 3331.65,2771.65 3346.46,2786.46 R19.2 ; C37.2@3295,2220.59 3335.59,2220.59 3350.39,2235.39 R18.2 ; R19.2@3343.79,2951.18 R19.2 ; U6.7 3390,1635.12 3372.28,1652.83 R20.2 3326.77,1565 3306.77,1545 v2(3275.2,1545) ; U7.7 3411.12,2388.88 3393.4,2406.6 R18.2 ; v3(3560,2940) 3556.13,2936.13 U8.7 3423.87,2936.13 3406.15,2953.85 R19.2 ; v3(3735,4142.5) 3732.5,4145 v2(3620,4145) 3220,4145 3100,4145 2950,4145 ; U2.8 3816.36,4436.36 3841.96,4461.96 C7.2
  Top Layer w25: v2(2035,2585) 2036.22,2586.22 L1.2 ; C19.2 2264.96,2724.96 2234.69,2694.69 L1.2 ; C18.1 2663.78,2586.22 L1.2
  Bottom Layer w15: v3(3050,3450) 3065,3450 3080,3435 3080,3315 v3(3095,3300) ; v2(3620,4145) 3620,4008.02 v3(3650,3978.02)
  Bottom Layer w20: SWD.1 2035,4802.89 2035,4111 ; v2(2071,4111) 2035,4111 ; v2(2405,1515) 2404,1516 2404,1862.1 v2(2370.55,1895.55) 2070,1895.55 2050,1915.55 2050,2030 v2(2015,2065) 2015,2565 v2(2035,2585) 2035,4111 ; 2610,4160 2610,4590 2620,4600 v1(2620,4640) ; v2(3285,2690) v2(3285,2405) 3285,1699.8 3275.2,1690 v2(3275.2,1545) 3313.39,1506.81 3313.39,1153.54 ; v3(3560,2940) 3580,2960 v3(3580,3360) ; v3(3735,4142.5) 3750,4157.5 3750,4365 3770,4385 v3(3790,4385)
+12: *1.24 *3.2 *3.17 *3.18 *3.19 *4.2 *4.17 *4.18 *4.19 C9.1 C10.1 C12.2 C14.1 C16.2 C21.1 D7.2 DC.3 R6.2 R8.2 U3.1 U4.1 | length 11661.5
  Top Layer w12: *1.24 3256.18,3551.18 3265,3560 3265,3580 3280,3595 3783,3595 v2(3798,3580)
  Top Layer w25: DC.3@1180,1870 1380,1870 1540.16,1870 D7.2@1597.2,1927.05 ; C9.1 1317.24,2122.32 U3.1 1591.14,1933.11 D7.2@1597.2,1927.05 ; v2(1380,3295) 1380,3325 1364.57,3340.43 C21.1 1270,3448 1290,3468 1847.72,3468 1858.86,3456.86 U4.1 ; v2(2500,1350) 2540,1310 v2(3720,1310) ; v2(2500,1920) 2470,1950 1740,1950 1717.05,1927.05 D7.2 D7.2@1597.2,1927.05 ; v2(3798,2685) 3809,2685 3809.35,2684.65 R8.2 4059.24,2716.32 *4.2 *4.19 *4.18 *4.17 ; v2@3799,1507 4025.72,1507 R6.2 4057.83,1535.43 *3.2 *3.19 *3.18 *3.17 ; v2(3800,3145) 3880.83,3145 C16.2 3983.94,3146.06 4000,3130 4000,3000 4023.39,2976.61 C14.1 ; v2@3801,2001 3878.28,2001 C12.2 3968.61,1997.39 3994,1972 3994,1883 4009,1868 C10.1@4152,1868
  Bottom Layer w25: DC.3@1380,1870 v2(1380,3295) ; v2(2500,1350) v2(2500,1920) ; v2(3720,1310) 3760,1310 3798,1348 v2(3798,1507) v2(3798,2001) v2(3798,2685) v2(3798,3580)
-5V: C21.2 C22.2 C23.1 C33.2 C34.2 C35.2 D4.1 U4.3 U4.5 U4.6 U6.4 U7.4 U8.4 | length 6559
  Top Layer w20: U4.6 U4.3
  Top Layer w25: C21.2 1678.23,2978.23 U4.6 ; U4.5 1591.14,3158.86 U4.6 ; C23.1 2794.96,2724.96 ; v2(2770,3190) C22.2 ; v2(2820,2750) 2794.96,2724.96 ; D4.1@2820,3387.16 D4.1 2720,3420 2690,3390 2690,3200 C22.2 ; U6.4 3741.53,1735.12 v2(3744.41,1738) ; C33.2 3715.09,1474.09 3744.41,1503.41 v2(3744.41,1507.59) ; U7.4 v2(3746.88,2488.88) ; C34.2 v2(3744.41,2224.41) ; U8.4 3744.13,3036.13 v2(3745,3037) ; v2(3743.65,2771.65) C35.2 3680.71,2670.71 3645,2635 2884.92,2635 2794.96,2724.96 ; U4.6 1890,3190 C22.2
  Bottom Layer w25: v2(2770,3190) 2790,3190 2820,3160 2820,2755 2815,2750 v2(2820,2750) ; v2(3744.41,1507.59) v2(3744.41,1738) v2(3744.41,2224.41) ; v2@3745,2224.41 v2(3745,3037)
-12: *1.1 *3.1 *3.10 *3.11 *3.13 *3.14 *3.20 *4.1 *4.10 *4.11 *4.13 *4.14 *4.20 C11.2 C13.2 C15.2 C17.2 C24.1 C25.1 D5.1 D6.1 D8.1 DC.1 R10.1 R11.1 | length 11408.2
  Top Layer w12: *1.1 3051.18,3551.18 3070,3570 3070,3595 3090,3615 4340,3615 4355,3600 v2(4355,3575)
  Top Layer w25: DC.1@1180,1470 1380,1470 1536.73,1470 D8.1 ; v2(1410,1075) 3735,1075 3755,1055 4280,1055 v2(4290,1055) ; D5.1 D5.1@3881.89,1569.14 ; D6.1 D6.1@3881.89,2753.28 ; R10.1 4026.57,1158.86 C24.1 4050,1135.43 *3.10 4470,1135.43 ; C13.2 D5.1@3881.89,1569.14 ; R11.1 C25.1 4058.09,2316.32 *4.10 4450,2316.32 ; C17.2 D6.1@3881.89,2753.28 ; v2@4351.61,2976.61 v2(4355,2976.61) C15.2 ; v2(4356.18,1811.18) C11.2 C11.2@4451.76,1810 ; *4.11 4450,2316.32 ; *4.14 *4.13 4476.32,2416.32 4450,2390 4450,2316.32 ; *3.11 4470,1135.43 ; *3.14 *3.13 4485.43,1235.43 4470,1220 4470,1135.43 ; *3.20 *3.1 3898.18,1585.43 D5.1@3881.89,1569.14 ; 4576.32,2766.32 *4.20 *4.1 3894.93,2766.32 D6.1@3881.89,2753.28
  Bottom Layer w25: DC.1@1380,1470 1380,1105 v2(1410,1075) ; v2(4290,1055) 4300,1055 4340,1055 4355,1070 v2(4355,1135) v2(4355,1585) v2(4355,2320) v2(4355,2765) v2(4355,2976.61) v2(4355,3575)
AD-Vout0: *9.5 U8.6 | length 1477.1
  Top Layer w10: *9.5 2989.37,3850.63 3005,3835 v1(3210,3835) ; v1(3240,3105) 3535,3105 3545,3095 3545,3005 3526.13,2986.13 U8.6
  Bottom Layer w10: v1(3210,3835) 3220,3825 3220,3125 v1(3240,3105)
CANH: CAN.1 R28.1 U10.7 | length 711.4
  Top Layer w10: v3(3224,4335) U10.7 3476.96,4335 R28.1
  Bottom Layer w10: CAN.1 3200,4712.43 3200,4359 v3(3224,4335)
CANL: CAN.2 R28.2 U10.6 | length 681.3
  Top Layer w10: v3(3290,4285) U10.6 3476.96,4285 R28.2
  Bottom Layer w10: CAN.2 3275,4737.43 3275,4300 v3(3290,4285)
CANRX: U5.44 U10.4 | length 2668.8
  Top Layer w10: v1(1800,4770) v1(2345,4770) ; v1(1821.54,4188.46) U5.44 ; v1(2370,4445) 2370,4440 2400,4410 2520,4410 2568.37,4361.63 2713.37,4361.63 2735,4340 2735,4285 2760,4260 2905,4260 2985,4340 3065,4340 3095,4310 3095,4250 3110,4235 U10.4
  Bottom Layer w10: v1(1800,4770) 1780,4750 1780,4230 v1(1821.54,4188.46) ; v1(2345,4770) 2370,4745 v1(2370,4445)
CANTX: U5.45 U10.1 | length 2443
  Top Layer w10: v1(1830,4745) v1(2320,4745) ; v1(1840,4210) 1841.85,4208.15 U5.45 ; v1(2345,4500) 2385,4460 2530,4460 2578.37,4411.63 2713.37,4411.63 2755,4370 2755,4305 2780,4280 2890,4280 2995,4385 U10.1
  Bottom Layer w10: v1(1830,4745) 1805,4720 1805,4245 v1(1840,4210) ; v1(2320,4745) 2345,4720 v1(2345,4500)
"CH340 D+": U9.5 USART.3 | length 381.5
  Top Layer w10: v1(2575,4390) 2579.56,4385.44 U9.5
  Top Layer w15: v1@2555.39,4640 USART.3
  Bottom Layer w10: v1(2555,4640) 2555,4410 v1(2575,4390)
"CH340 D-": U9.6 USART.2 | length 296
  Top Layer w10: v1(2580.98,4469.02) 2614.56,4435.44 U9.6
  Top Layer w15: v1(2580,4625) 2580,4692.65 USART.2
  Bottom Layer w10: v1@2580,4620 2580,4470 v1(2580.98,4469.02)
Current0: *9.4 U7.6 | length 2025.9
  Top Layer w10: *9.4 2969.68,3825.32 2990,3805 v1(3170,3805) ; v1(3220,2535) 3525,2535 3540,2520 3540,2460 3518.88,2438.88 U7.6
  Bottom Layer w10: v1(3170,3805) 3180,3795 3180,3070 3205,3045 3205,2550 v1(3220,2535)
DA0: *1.3 *4.5 | length 2233.8
  Top Layer w12: v3(2930,2590) 2953.68,2566.32 *4.5 ; v3(2930,3495) 2935,3500 *1.3
  Bottom Layer w12: v3(2930,2590) 2920,2600 2920,3485 v3(2930,3495)
DA1: *1.23 *3.5 | length 3576.2
  Top Layer w12: v3(2955,1420) 2989.57,1385.43 *3.5 ; v3(3080,3525) 3080.59,3525.59 *1.23
  Bottom Layer w12: v3(2955,1420) 2955,2500 2980,2525 2980,3500 3005,3525 v3(3080,3525)
DA_CLR#: *1.11 U5.29 | length 1822.1
  Top Layer w10: U5.29 1867.8,3841.84 1843,3817.04 1843,3717 1870,3690 2050,3690 2130,3770 v1(2770,3770) ; v1(2844.72,3295.28) *1.11
  Bottom Layer w10: v1(2770,3770) 2790,3750 2790,3350 v1(2844.72,3295.28)
DA_LDAC#: *1.10 U5.30 | length 1786.3
  Top Layer w10: U5.30 1887.48,3837.48 1860,3810 1860,3730 1880,3710 2045.96,3710 2122.96,3787 2737,3787 2745,3795 2785,3795 v1(2810,3770) ; v1(2869.13,3320.87) *1.10
  Bottom Layer w10: v1(2810,3770) 2810,3380 v1(2869.13,3320.87)
DA_SCLK: *1.8 R22.1 U5.34 | length 1548.7
  Top Layer w10: U5.34 2168.39,3991.61 v1(2170,3990) 2172.05,3987.95 R22.1 2207.29,3909.24 2790.76,3909.24 2792,3908 v1(2801,3908) ; v1(2870,3380) 2877.95,3372.05 *1.8
  Bottom Layer w10: v1(2801,3908) 2850,3859 2850,3400 v1(2870,3380)
DA_SDIN: *1.9 R25.1 U5.36 | length 1717.4
  Top Layer w10: U5.36 2490,4030.98 v1(2492.13,4028.86) R25.1 ; v1(2559,3875) 2559,3874 2575,3858 2816,3858 v1@2832,3842 ; v1(2870,3350) 2873.54,3346.46 *1.9
  Bottom Layer w10: v1(2492.13,4028.86) 2551.14,4028.86 2560,4020 2559,4019 v1(2559,3875) ; v1@2830,3840 2830,3390 v1(2870,3350)
  other v1: 2829,3842
DA_SDO: *1.16 R23.1 U5.35 | length 2167.5
  Top Layer w10: U5.35 2323.7,4011.3 v1(2330,4005) 2332.09,4002.91 R23.1 R23.1@2332.09,3943.11 ; v1(2354,4079) 2811,4079 v1(2840,4050) ; v1(2868,3934) 2868,3827 2915,3780 v1(3250,3780) ; *1.16 v1(3276.46,3346.46)
  Bottom Layer w10: v1(2330,4005) 2330,4055 v1(2354,4079) ; v1(2840,4050) 2868,4022 v1(2868,3934) ; v1(3250,3780) 3280,3780 3300,3760 3300,3360 3286.46,3346.46 v1(3276.46,3346.46)
DA_SYNC#: *1.7 U5.33 | length 1525.9
  Top Layer w10: U5.33 2063.07,3971.93 v1(2070,3965) ; v1(2095,3810) 2545,3810 2555,3820 2820,3820 v1(2875,3765)
  Top Layer w12: v1(2880,3410) 2892.36,3397.64 *1.7
  Bottom Layer w10: v1(2070,3965) 2080,3955 2080,3825 v1(2095,3810) ; v1@2873,3765 2873,3417 v1(2880,3410)
Force0: *9.6 U6.6 | length 2745.1
  Top Layer w10: *9.6 2989.37,3960.63 3015,3935 3015,3880 3040,3855 v1(3250,3855) ; v1(3381,1686) 3381.88,1685.12 U6.6
  Bottom Layer w10: v1(3250,3855) 3300,3855 3327,3828 3327,1712 3353,1686 v1(3381,1686) v1@3382,1686
Force+: "Force Sensor.1" U6.3 | length 627.9
  Top Layer w10: v1(3581,1685.12) U6.3
  Bottom Layer w10: 3513.39,1153.54 3557,1197.16 3557,1674 3568.12,1685.12 v1(3581,1685.12)
Force-: "Force Sensor.2" U6.2 | length 679.6
  Top Layer w10: v1(3521,1621) 3535.12,1635.12 U6.2
  Bottom Layer w10: 3413.39,1153.54 3413.39,1220.39 3430,1237 3500,1237 3521,1258 v1(3521,1621)
GND: *1.15 *10.2 C1.1 C3.2 C5.2 C7.1 C8.2 C9.2 C18.2 C19.1 C20.2 C22.1 C23.2 C26.1 C27.1 C28.1 C29.1 C39.2 C40.2 C41.2 C42.1 C43.2 C45.1 C46.1 C47.1 C48.1 C49.1 C50.2 C51.2 C52.2 C53.2 C54.2 C55.2 D1.1 D7.1 D8.2 D9.K DC.2 KEY.2 L2.2 L3.1 R27.1 RESET.2 RS232.4 RS485.3 SWD.3 T1.1 T2.1 T3.1 U1.15 U2.5 U3.3 U3.5 U3.6 U4.4 U5.12 U5.18 U5.63 U9.1 U10.2 U10.8 USART.5 VR1.1 | length 2926
  Top Layer w25: DC.2@1180,1670 DC.2@1380,1670 ; C29.1 C28.1 C26.1 C27.1 ; L2.2 2234.69,2835.31 2274.96,2795.04 C19.1 C23.2 2655.04,2795.04 2680,2820 C22.1 ; C18.2 2740,2350 2767.16,2322.84 D1.1
  Top Layer w30: C9.2 1678.23,2531.77 U3.6 ; U3.3 U3.6 ; U3.5 1858.86,2351.14 U3.6
  other v4: 1103.77,1074.09 1178.96,1075.66 1064.8,1138.43 1215.2,1141.57 1101.04,1204.34 1176.23,1205.91 1103.77,4696.61 1178.96,4698.18 4731.48,4701.81 4806.68,4703.38 1064.8,4760.94 1215.2,4764.09 4692.52,4766.14 4842.91,4769.29 1101.04,4826.85 1176.23,4828.43 4728.75,4832.05 4803.95,4833.63
KEY1: C20.1 KEY.1 R5.2 U5.10 | length 5306.2
  Top Layer w10: v1(1407,3998) 1444,4035 1471,4035 1526.04,4090.04 U5.10 ; v1(1410,3530) 1440,3500 2730,3500 2890,3660 4789,3660 4829,3700 4829,4114 4811.35,4131.65 KEY.1 4304.65,4131.65 4291.73,4118.73 C20.1 R5.2
  Bottom Layer w10: v1(1407,3998) 1407,3533 v1(1410,3530)
LED_G: LED1.K U5.9 | length 4055.2
  Top Layer w10: v1(1470,3570) 1470,3550 1486,3534 2704,3534 2870,3700 4731,3700 4747.64,3716.64 LED1.K ; v1(1473,4087) 1495.72,4109.72 U5.9
  Bottom Layer w10: v1(1470,3570) 1470,4084 v1(1473,4087)
LED_R: LED0.K U5.8 | length 4444.5
  Top Layer w10: v1(1440,3550) 1440,3530 1453,3517 2717,3517 2880,3680 4770,3680 4800,3710 4800,3940 4787.24,3952.76 LED0.K ; v1(1455,4128) 1456.41,4129.41 U5.8
  Bottom Layer w10: v1(1440,3550) 1440,4113 v1(1455,4128)
Net*3_4: *3.4 *3.7 D5.2 R6.1 | length 571.2
  Top Layer w18: D5.2 3885.63,1435.09 R6.1 4027.91,1435.43 *3.4 4234.57,1435.43 4250,1420 4250,1300 4235.43,1285.43 *3.7
Net*3_9: *3.9 C24.2 R10.2 | length 319
  Top Layer w18: R10.2 4026.57,1228.94 C24.2 4082.05,1227.95 4124.57,1185.43 *3.9
Net*4_4: *4.4 *4.7 D6.2 R8.1 | length 590.3
  Top Layer w20: D6.2 3882.72,2616.32 *4.4 4243.68,2616.32 4250,2610 4250,2470 4246.32,2466.32 *4.7
Net*4_6: *4.6 *4.15 *4.16 R7.1 U7.3 | length 2144.4
  Top Layer w25: U7.3 3802.88,2438.88 3803,2439 ; *4.6 3837.32,2516.32 3803,2482 3803,2439 ; *4.16 *4.15 4593.68,2516.32 4610,2500 4610,2360 4618.62,2351.38 R7.1 4736.22,2266.22 4720,2250 3854,2250 3803,2301 3803,2439
Net*4_9: *4.9 C25.2 R11.2 | length 313.2
  Top Layer w20: R11.2 C25.2 4073.07,2416.93 4123.68,2366.32 *4.9
Net*6_2: *6.2 C30.2 R18.1 U7.5 | length 446.4
  Top Layer w10: *6.2 3153.39,2413.39 3160,2420 3160,2470 3166.68,2476.68 3230.91,2476.68 R18.1 3362.6,2488.88 U7.5
Net*7_2: *7.2 C31.2 R19.1 U8.5 | length 451.1
  Top Layer w10: *7.2 3140.63,2960.63 3150,2970 3150,3010 3163.92,3023.92 3224.41,3023.92 R19.1 3358.66,3036.13 U8.5
Net*8_2: *8.2 C32.2 R20.1 U6.5 | length 431.7
  Top Layer w10: *8.2 3129.13,1659.13 3140,1670 3140,1710 3152.91,1722.91 C32.2 R20.1 ; R20.1@3326.77,1735.12 U6.5
NetC2_1: C2.1 U1.3 | length 193.1
  Top Layer w10: C2.1 3352.07,3938.93 3364.16,3926.84 U1.3
NetC2_2: C2.2 U1.1 | length 207.7
  Top Layer w10: C2.2 3422.52,4049.48 3432,4040 3432,3988 3441.98,3978.02 U1.1
NetC4_1: C4.1 U1.4 | length 343.6
  Top Layer w10: C4.1 3226.04,3915.22 3240,3901.25 U1.4
NetC4_2: C4.2 U1.5 | length 507.2
  Top Layer w10: C4.2@3210.34,4049.48 3185,4049.48 3180,4044.48 3180,3900 3203.54,3876.46 3499.71,3876.46 U1.5
NetC5_1: C5.1 U1.2 | length 192.8
  Top Layer w10: U1.2 3556.43,3952.43 3564.28,3960.28 C5.1
NetC8_1: C8.1 U1.6 | length 127.1
  Top Layer w10: C8.1 3415.11,3850.07 U1.6
NetC40_1: C40.1 U5.31 | length 141.2
  Top Layer w10: C40.1@1907.17,3760.83 U5.31
NetC41_1: C41.1 U5.47 | length 186.1
  Top Layer w10: U5.47 2077.52,4247.52 2110.2,4280.2 2169.29,4280.2
NetC43_1: C43.1 U9.4 | length 259.5
  Top Layer w10: U9.4 2694.56,4335.44 2710,4320 2710,4235 2727.39,4217.61 C43.1
NetC45_2: C45.2 U9.7 Y1.1 | length 308.1
  Top Layer w10: U9.7 2804.97,4485.44 Y1.1 2805.05,4475.79 C45.2
NetC46_2: C46.2 U9.8 Y1.3 | length 443.7
  Top Layer w10: U9.8 2715.44,4535.44 2760,4580 2891.45,4580 2896.45,4575 Y1.3 2899.92,4547.04 C46.2
NetC53_1: C53.1 L4.1 U5.13 | length 597.7
  Top Layer w10: L4.1 1145.67,3962 ; C53.1 1145.67,3962 ; U5.13 1513.98,4030.98 1445,3962 1145.67,3962
NetD1_2: D1.2 L1.1 U3.2 | length 1130.6
  Top Layer w25: U3.2 1658.07,2031.93 1690,2000 2200,2000 2234.69,2034.69 L1.1 2238.46,2110 D1.2
NetD2_A: LED1.A R3.2 | length 115
  Top Layer w10: R3.2 LED1.A
NetD3_A: LED0.A R4.2 | length 115
  Top Layer w10: R4.2 LED0.A
NetD4_2: D4.2 L2.1 U4.2 | length 1004.3
  Top Layer w25: U4.2 1791.93,3318.07 1810,3300 2220,3300 2234.69,3314.69 L2.1 2238.46,3420 D4.2
NetD9_A: D9.A R24.2 | length 141.7
  Top Layer w10: D9.A R24.2
NetR9_2: R9.2 R12.1 U8.3 | length 1973
  Top Layer w20: v2(3624.87,2986.13) U8.3 ; v2(3646,3310) v2(4667,3310) ; R9.2 R12.1 v2(4685.43,2941.43)
  Bottom Layer w20: v2@3622,2989 3612,2999 3612,3276 v2(3646,3310) ; v2(4667,3310) 4685.43,3291.57 v2(4685.43,2941.43)
NetR13_1: R13.1 U8.1 | length 300.8
  Top Layer w10: R13.1 3484.55,2824.55 3490,2830 3670,2830 3679.86,2839.86 U8.1
NetR13_2: R13.2 U8.8 | length 168.3
  Top Layer w10: R13.2 3414.47,2874.47 3426.13,2886.13 U8.8
NetR14_1: R14.1 U7.1 | length 291.7
  Top Layer w10: R14.1 3481.89,2271.89 3490,2280 3660,2280 3669.29,2289.29 U7.1
NetR14_2: R14.2 U7.8 | length 163.1
  Top Layer w10: R14.2 3411.81,2331.81 3418.88,2338.88 U7.8
NetR15_1: R15.1 U6.1 | length 284.4
  Top Layer w10: R15.1 3458.89,1518.89 3470,1530 3630,1530 3641.73,1541.73 U6.1
NetR15_2: R15.2 U6.8 | length 159.5
  Top Layer w10: R15.2 3388.81,1578.81 3395.12,1585.12 U6.8
NetR27_2: R27.2 U5.60 | length 219.9
  Top Layer w10: R27.2 1682.76,4457.24 1710.31,4429.69 U5.60
NRST: C39.1 R26.2 RESET.1 U5.7 | length 2263.5
  Top Layer w10: U5.7 1611.91,4149.09 v1(1623,4138) ; v1(1637,3615) 2040,3615 2675,3615 2690,3630 RESET.1@2690,3713 ; C39.1@2172.05,3735.83 2332.09,3735.83 2679.17,3735.83 RESET.1@2692.91,3722.09
  Bottom Layer w10: v1(1623,4138) 1623,3629 v1(1637,3615)
OSC_IN: C47.2 U5.5 Y2.3 | length 575.8
  Top Layer w10: C47.2 1228,4157.43 1228,4285 1250.09,4307.09 Y2.3 1303.15,4287.85 1327,4264 1416,4264 1491.54,4188.46 U5.5
OSC_OUT: C48.2 U5.6 Y2.1 | length 304.5
  Top Layer w10: Y2.1 Y2.1@1374.02,4212.6 ; C48.2 Y2.1@1374.02,4212.6 ; U5.6 1481.22,4168.78 1437.4,4212.6 Y2.1@1374.02,4212.6
PC12: U2.2 U2.3 U5.53 | length 2302.6
  Top Layer w10: U5.53 1848.11,4452.15 1875.96,4480 2275,4480 2298,4503 2298,4537.04 2337.96,4577 2681.04,4577 2734.04,4630 3530,4630 v1(3545,4615) ; v1(3555,4335) U2.2 U2.3
  Bottom Layer w10: v1(3545,4615) 3545,4345 v1(3555,4335)
RDY0: *9.2 R16.1 U5.57 | length 1924
  Top Layer w10: U5.57 1769.37,4477.37 1779,4487 1848,4487 1861,4500 1968,4500 2013.59,4545.59 R16.1 2065,4534.87 v1(2065,4504) ; v1(2111,4066) 2125,4052 2767,4052 2787,4032 2787,3980 2801,3966 2916,3966 2930.31,3951.69 *9.2
  Bottom Layer w10: v1(2065,4504) 2065,4160 2111,4114 v1(2111,4066)
RXD: U5.43 U9.2 | length 828
  Top Layer w10: U5.43 2188.78,4168.78 v1(2190,4170) ; v1(2240,4200) 2240,4310 2260,4330 2340,4330 2358.37,4311.63 2503.37,4311.63 2579.56,4235.44 U9.2
  Bottom Layer w10: v1(2190,4170) 2230,4170 2240,4180 v1(2240,4200)
RXD2: U1.12 U5.17 | length 3021.9
  Top Layer w10: v1(1530,3570) 1549,3551 2691,3551 2860,3720 3810,3720 3830,3740 3830,3840 3794.34,3875.66 U1.12 ; v1(1540,3840) 1550,3850 1620,3850 1631.57,3861.57 U5.17
  Bottom Layer w10: v1(1530,3570) 1530,3830 v1(1540,3840)
RXD2_In: RS232.5 U1.13 | length 887.3
  Top Layer w10: U1.13 4118.75,3901.25 4160,3860 v3(4200,3860)
  Bottom Layer w10: v3(4200,3860) 4220,3860 4241.23,3881.23 RS232.5
RXD3: U2.1 U5.52 | length 2211.4
  Top Layer w10: U5.52 v1(1867.8,4393.8) ; v1(1910,4407) 1954,4407 1962,4415 v1(2234,4415) ; v1(2265,4544) 2315,4594 2674,4594 2727,4647 3578,4647 v1(3615,4610) ; U2.1 3615,4388.36 v1(3615,4430)
  Bottom Layer w10: v1(1867.8,4393.8) 1867.8,4399.8 1875,4407 v1(1910,4407) ; v1(2234,4415) 2265,4446 v1(2265,4544) ; v1(3615,4430) v1(3615,4610)
SCL: *9.10 *10.6 R17.1 U5.58 | length 2544.7
  Top Layer w10: *10.6 1424.17,4664.17 1450,4690 1968,4690 1994,4664 v1(1994,4653) ; U5.58 1749.68,4485.68 1768,4504 1840,4504 1870.58,4534.57 1919.42,4534.57 R17.1 1946.85,4562 v1(1994,4562) ; v1(2002,4390) 2010,4382 v1(2272,4382) ; v1(2290,4125) 2315,4100 2900.63,4100 2910.63,4090 *9.10
  Bottom Layer w10: v1(1994,4653) v1(1994,4562) 2002,4554 v1(2002,4390) ; v1(2272,4382) 2290,4364 v1(2290,4125)
SDA: *9.9 *10.1 R21.1 U5.59 | length 2589.5
  Top Layer w10: *10.1 1310,4681 1345,4716 1839,4716 v1(1840,4715) ; U5.59 1730,4520 1755.59,4545.59 R21.1 1821.01,4560 v1(1863,4560) ; v1(1921,4442) 2288,4442 v1(2295,4435) ; v1(2325,4145) 2353,4117 2907.67,4117 2930.31,4094.36 *9.9
  Bottom Layer w10: v1(1840,4715) 1863,4692 v1(1863,4560) 1863,4500 v1(1921,4442) ; v1(2295,4435) 2310,4420 2310,4160 v1(2325,4145)
SGND: "Force Sensor.4" *1.18 *1.19 *1.20 *1.21 *2.1 *6.1 *7.1 *8.1 *9.1 *9.3 *9.7 C6.1 C10.2 C11.1 C12.1 C13.1 C14.2 C15.1 C16.1 C17.1 C30.1 C31.1 C32.1 C33.1 C34.1 C35.1 C36.1 C37.1 C38.1 C44.2 DA0.2 DA1.2 L3.2 R12.2 T4.1 U8.2 | length 624.5
  Top Layer w10: 2910.63,3824.37 *9.1 ; 2947.68,3822.68 2950,3825 *9.3 2950,3950 2969.68,3969.68 *9.7
  Top Layer w12: *9.7 2969.68,4099.69 2980,4110 2990,4110
  Top Layer w20: 2910.63,3824.37 2947.68,3824.37
  Top Layer w30: 2990,4110 3015,4110 3035,4090 3035,3995 3050.6,3979.4 C44.2
  other v4: 4731.48,1075.82 4806.68,1077.4 4692.52,1140.16 4842.91,1143.31 4728.75,1206.07 4803.95,1207.64
SWCLK: SWD.4 U5.49 | length 849.7
  Top Layer w10: v1(1723,4272) 1910,4272 1926.85,4288.85 U5.49
  Bottom Layer w10: SWD.4 1704,4833.89 1704,4291 v1(1723,4272)
SWDIO: SWD.2 U5.46 | length 712.2
  Top Layer w10: v1(1940.83,4227.83) U5.46
  Bottom Layer w10: SWD.2 1945,4792.89 1945,4379 1928,4362 1928,4240.67 v1(1940.83,4227.83)
TXD: U5.42 U9.3 | length 872.6
  Top Layer w10: U5.42 2204.09,4149.09 2215,4160 2215,4345 2230,4360 2505,4360 2579.56,4285.44 U9.3
TXD2: U1.11 U5.16 | length 2956.8
  Top Layer w10: v1(1490,3940) 1490,3950 1511.93,3971.93 U5.16 ; v1(1500,3640) 1570,3570 2680,3570 2850,3740 3780,3740 3800,3760 3800,3830 3779.93,3850.07 U1.11
  Bottom Layer w10: v1(1490,3940) 1490,3650 v1(1500,3640)
TXD2_Out: RS232.3 U1.14 | length 955.5
  Top Layer w10: U1.14 4133.16,3926.84 4170,3890 v3(4316,3890)
  Bottom Layer w10: v3(4316,3890) 4320,3890 4341.23,3911.23 RS232.3
TXD3: U2.4 U5.51 | length 2263.6
  Top Layer w10: U5.51 1887.48,4446.48 1904,4463 2282.04,4463 2315,4495.96 2315,4530 2345,4560 2688.08,4560 2741.08,4613 3477,4613 v1(3525,4565) ; v1(3540,4235) U2.4
  Bottom Layer w10: v1(3525,4565) 3525,4250 v1(3540,4235)
Vout0: DA0.1 R7.2 R9.1 U7.2 | length 2690.9
  Top Layer w20: R7.2@4736.22,2580 R7.2 4755.51,2620.67 R9.1
  Top Layer w25: U7.2 3730.12,2388.88 3746,2373 3746,2283 3823,2206 4796,2206 4840,2250 4840,2434 4816,2458 4753,2458 4736.22,2474.78 R7.2@4736.22,2580
  Bottom Layer w25: v2(4700,2580) v2(4780,2580) 4810,2580 4840,2610 4840,3130 4812.52,3157.48 DA0.1
Vout1: *3.6 *3.15 *3.16 DA1.1 | length 2636.2
  Top Layer w25: *3.6 3838.43,1335.43 3812,1309 3812,1118 3835,1095 4616,1095 4630,1109 4630,1319 4613.57,1335.43 *3.15 *3.16 4791.43,1385.43 v3(4820,1414)
  Bottom Layer w25: DA1.1 4801.31,1956.69 4820,1938 v3(4820,1414)
pads on no net: *1.2 *1.4 *1.6 *1.12 *1.13 *1.22 *1.25 *2.3 *3. *3.3 *3.8 *3.12 *4. *4.3 *4.8 *4.12 *6.3 *7.3 *8.3 *10.3 *10.4 RS232.1 RS232.2 RS232.6 RS232.7 RS232.8 RS232.9 RS232.10 U1.7 U1.8 U1.9 U1.10 U5.2 U5.3 U5.4 U5.11 U5.14 U5.15 U5.20 U5.21 U5.22 U5.23 U5.24 U5.25 U5.26 U5.27 U5.28 U5.37 U5.38 U5.39 U5.40 U5.41 U5.50 U5.54 U5.55 U5.56 U5.61 U5.62 U9.9 U9.10 U9.11 U9.12 U9.13 U9.14 U9.15 U10.5 USART. USART.4 USART.6 USART.7 Y1.2 Y1.4 Y2.2 Y2.4

## Polygon pours and split planes (outlines as drawn)
no net on Top Layer (solid, pour order 0): 2600,4700

## Silkscreen, mask and mechanical layers (free items; w line width, h text height)
Bottom Overlay:
  text "IO" at 1867.45,4684.15 h60 r270
  text "5V" at 1964.57,4674.15 h60 r270
  text "H" at 3189.98,4672.23 h60 r90
  text "L" at 3237.22,4632.24 h60 r270
  text "B" at 3720.47,4629.92 h60 r270
  text "A" at 3622.05,4625.98 h60 r270
  text "CLK" at 1665.35,4614.17 h60 r270
  text "GND" at 1766.4,4614.17 h60 r270
  text "GND" at 3818.9,4511.81 h60 r270
  text "GND" at 4232.28,4401.57 h60 r270
  text "RX" at 4181.1,4055.12 h60 r270
  text "TX" at 4283.46,4055.12 h60 r270
  text "IPMC Platform" at 1196.85,2826.77 h60 r90
  text "IBSS 180131" at 1311.02,2822.83 h60 r90
  text "+12V" at 1683.84,1838.58 h60
  text "GND" at 1633.86,1641.73 h60
  text "-12V" at 1683.84,1448.82 h60
Mechanical 1:
  lines w8: 2897.64,1000 2897.64,3641.73 4901.57,3641.73
Drill Drawing:
  lines w7.99: 999.84,1047.64 ccw(c1047.64,1047.64) 1047.64,999.84 ; 999.84,4853.94 cw(c1047.64,4853.94) 1047.64,4901.73 4854.72,4901.57 ; 4853.94,999.84 ccw(c4853.94,1047.64) 4901.73,1047.64 ; 4853.94,4901.73 cw(c4853.94,4853.94) 4901.73,4853.94
  lines w8: 999.84,4853.94 1000,1045.67 ; 1042.13,1000 4853.94,1000 ; 4901.57,4857.09 4901.73,1047.64